# Altium PCB dc24.PcbDoc
Units mm, origin at the board's own origin, x right, y up, seen from the top; angles counter-clockwise.
Board outline 49.25 x 49.25 mm, 2 copper layers (Top Layer, Bottom Layer); 82 components, 56 nets, 250 pads, 180 vias.
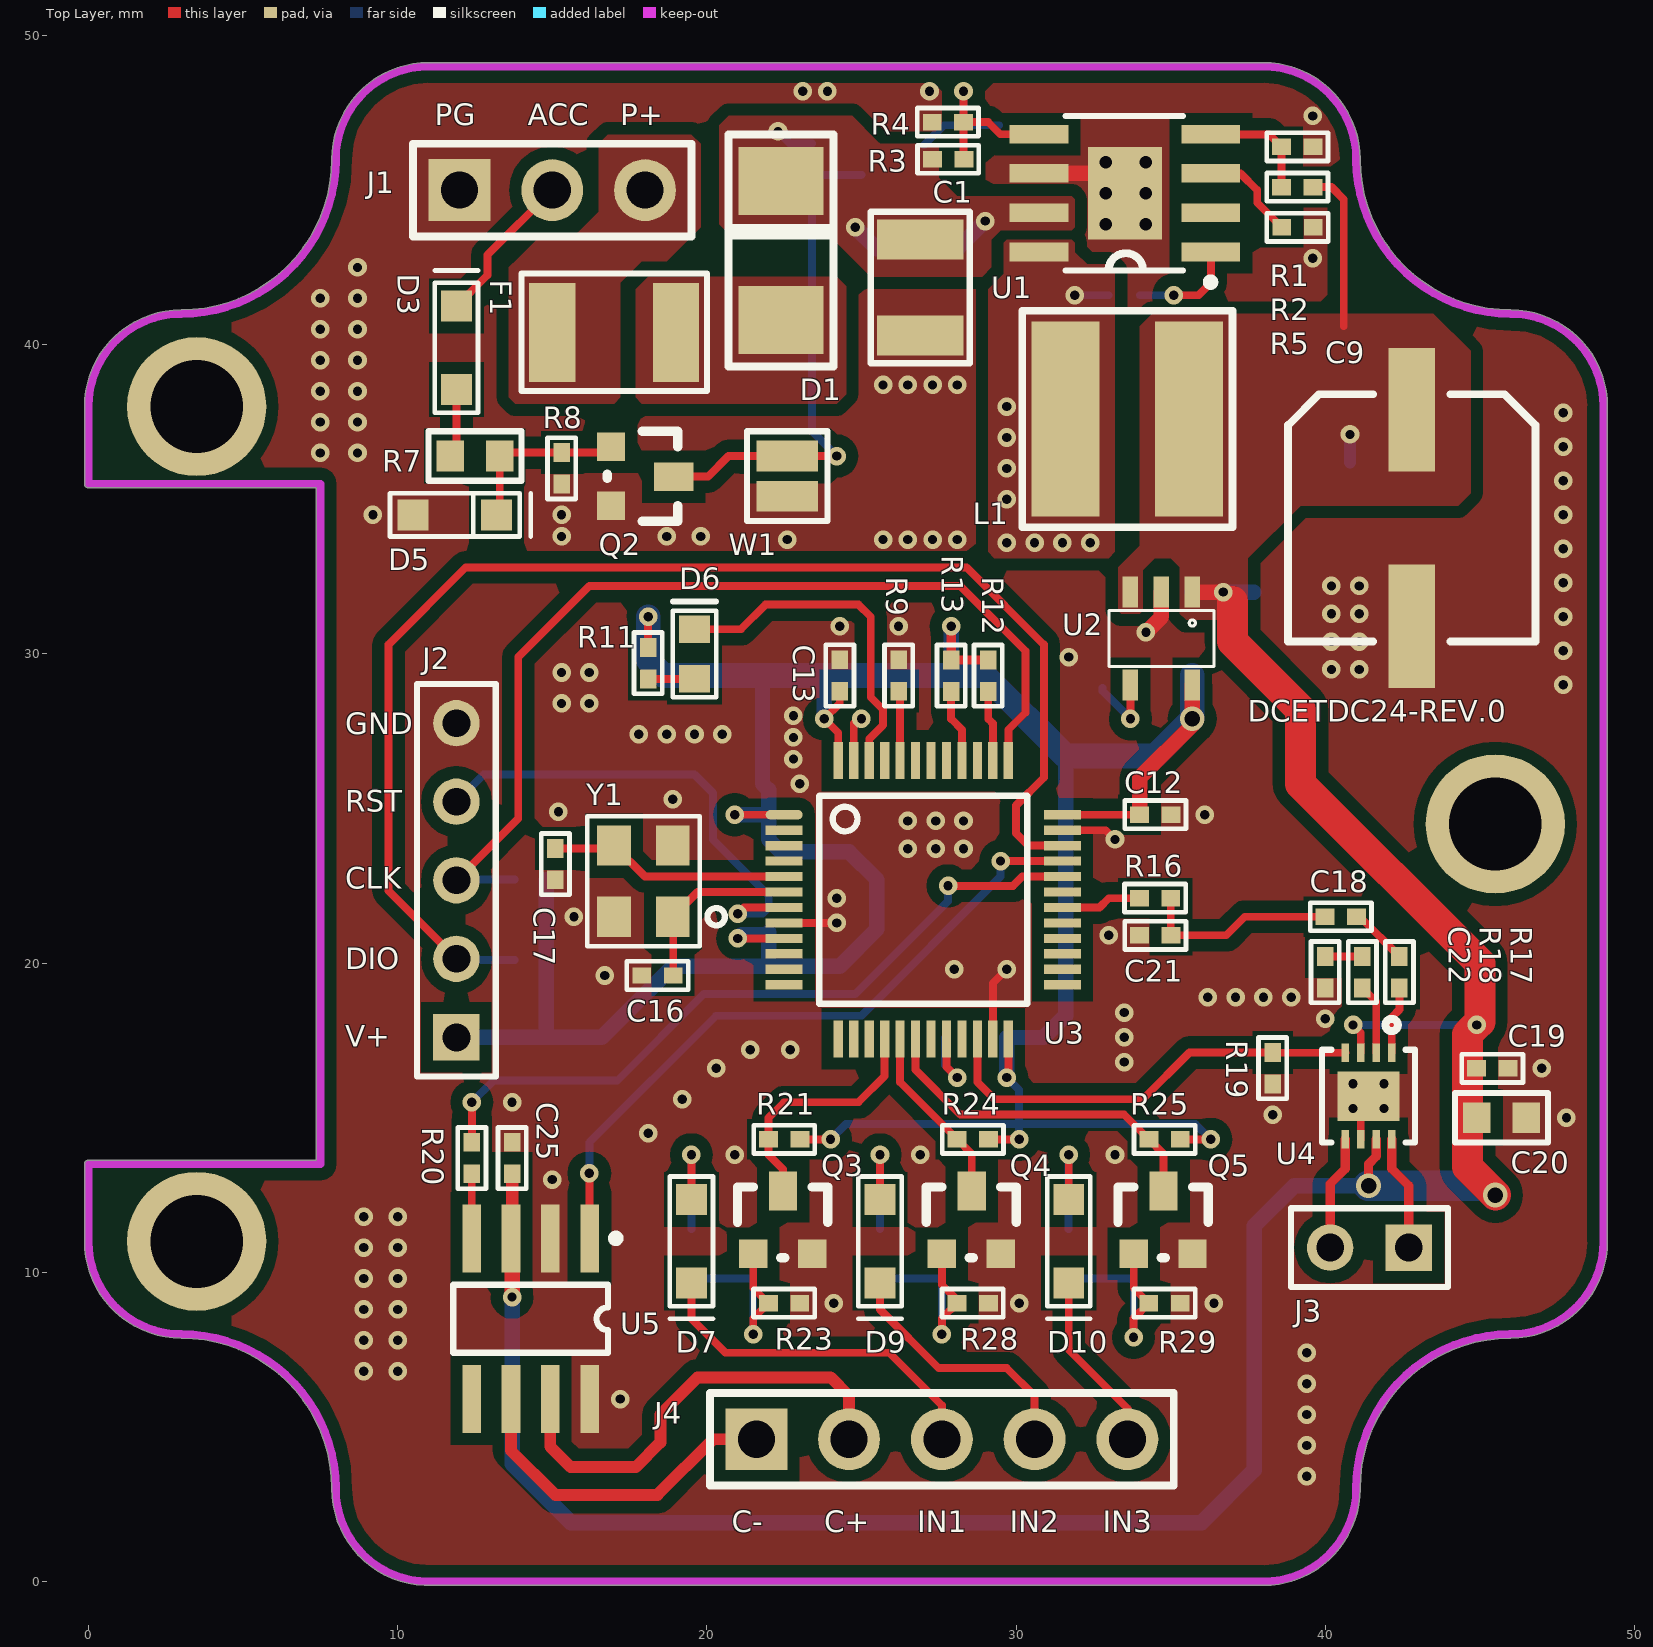
[diagram p0: Top Layer view]
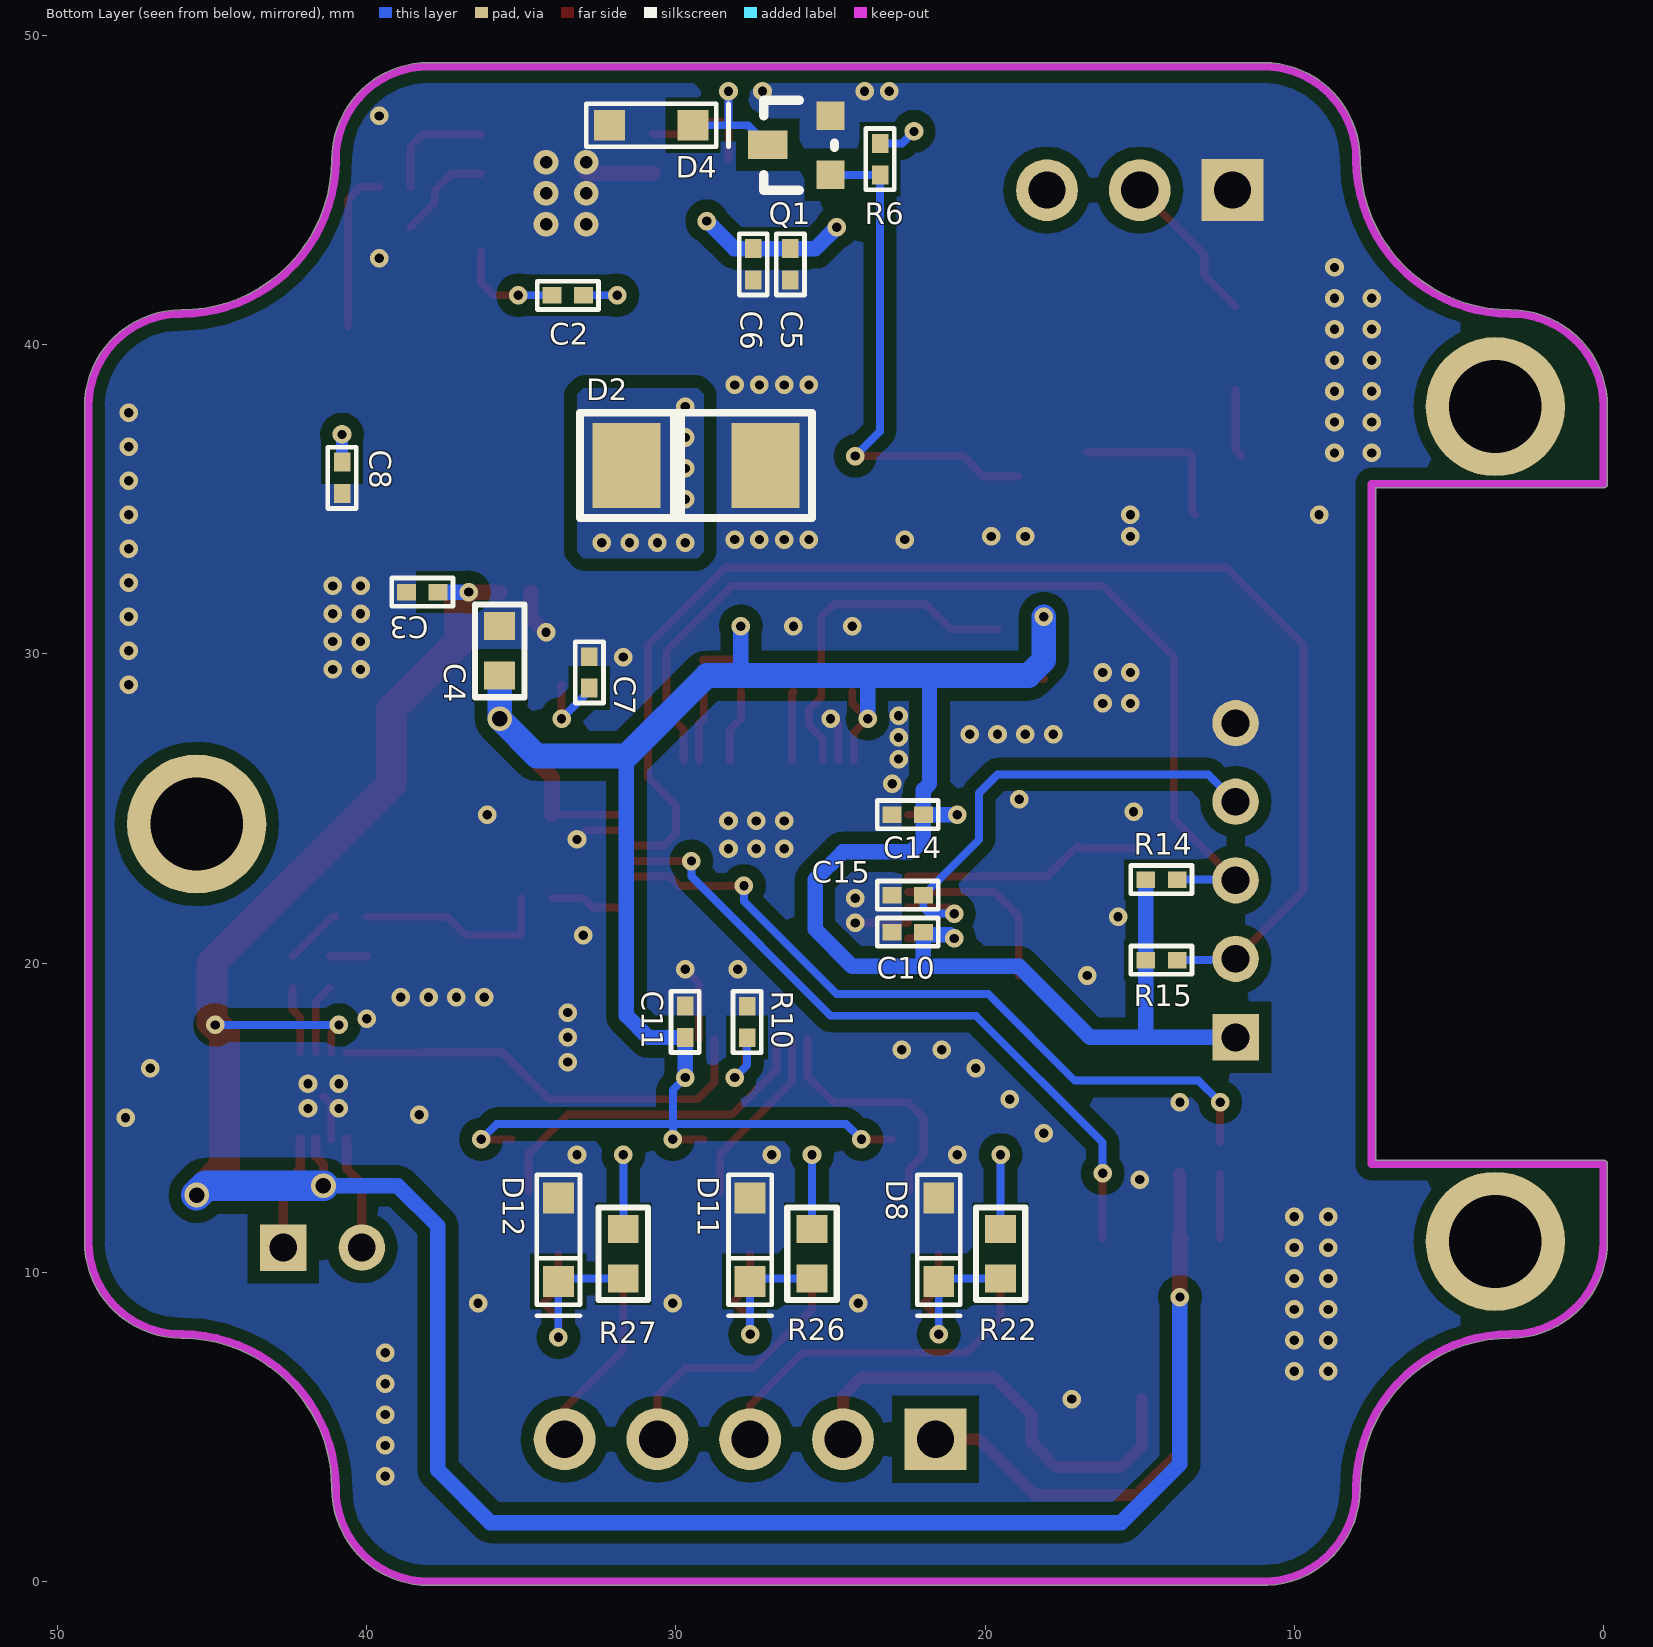
[diagram p1: Bottom Layer view, seen from below]

## Layer stack, top to bottom
Top Solder: solder mask 0.0102, Solder Resist, Dk 3.5
Top Layer: signal copper 0.0356
Dielectric 1: dielectric 0.32, FR-4, Dk 4.8
Bottom Layer: signal copper 0.0356
Bottom Solder: solder mask 0.0102, Solder Resist, Dk 3.5

## Board outline
3,7.873 cw(c3,11) -0.127,11 -0.127,13.5 cw(c0,13.5) 0,13.627 7.373,13.627 7.373,35.373 0,35.373 cw(c0,35.5) -0.127,35.5 -0.127,38 cw(c3,38) 3,41.127 ccw(c3,46) 7.873,45.979 cw(c8,45.978) 7.873,45.989 cw(c8,46) 7.873,46 cw(c11,46) 11,49.127 38,49.127 cw(c38,46) 41.127,46 cw(c41,46) 41.127,45.989 cw(c41,45.978) 41.127,45.979 ccw(c46,46) 46,41.127 cw(c46,38) 49.127,38 49.127,11 cw(c46,11) 46,7.873 cw(c46,8) 45.989,7.873 cw(c45.978,8) 45.979,7.873 ccw(c46,3) 41.127,3 cw(c38,3) 38,-0.127 10.9,-0.127 cw(c10.9,0) 10.875,-0.125 cw(c11,3) 7.873,3 cw(c8,3) 7.873,3.011 cw(c8,3.022) 7.873,3.021 ccw(c3,3)

## Design rules (kind name [scope] priority, off if disabled: settings)
Clearance Clearance_1 [InPolygon AND InNet('GND')] p1: gap=0.4
Clearance [All] p2: gap=0.127
ComponentClearance [All] p1: gap=0 collisioncheckmode=3 verticalgap=0 showdistances=FALSE
DiffPairsRouting [All] p1: maxlimit=0.254 minlimit=0.254 mostfreqgap=0.254 toplayer_minwidth=0.381 toplayer_maxwidth=0.381 toplayer_prefwidth=0.381 bottomlayer_minwidth=0.381 bottomlayer_maxwidth=0.381 bottomlayer_prefwidth=0.381 maxuncoupledlength=12.7
PolygonConnect [All] p1: connectstyle=Direct reliefconductorwidth=0.254 reliefentries=4 polygonreliefangle="90 Angle" airgapwidth=0.254
RoutingVias [All] p1: holewidth=0.3 width=0.6 viastyle="Through Hole" minholewidth=0.3 minwidth=0.6 maxholewidth=0.4 maxwidth=0.8
SolderMaskExpansion [All] p1: expansion=0.102
Width [All] p1: maxlimit=4 minlimit=0.254 preferedwidth=0.254 minimp=50.000000 maximp=50.000000 favimp=50.000000
28 further rules are at their usual default settings.

## Classes and differential pairs
component class 4-IO: C25 D7 D8 D9 D10 D11 D12 J4 Q3 Q4 Q5 R20 R21 R22 R23 R24 R25 R26 R27 R28 R29 U5
component class 3-AUDIO-AMP: C18 C19 C20 C21 C22 J3 R16 R17 R18 R19 U4
component class 2-MCU: C10 C11 C12 C13 C14 C15 C16 C17 D6 J2 R9 R10 R11 R12 R13 R14 R15 U3 Y1
component class 1-POWER: C1 C2 C3 C4 C5 C6 C7 C8 C9 D1 D2 D3 D4 D5 F1 J1 L1 Q1 Q2 R1 R2 R3 R4 R5 R6 R7 R8 U1 U2 W1
differential pair CAN: +CAN_P -CAN_N

## Components (designator, comment, footprint, x,y, rotation, side; value= is the part's Value field where it differs from the comment)
C1 "10uF/50V" 1210 26.9,43.4 r270 top
C2 "0.01uF/50V" 0402 33.5,41.6 r180 bottom
C3 "0.1uF/50V" 0402 38.2,32 r0 bottom
C4 "10uF/6.3V" 0603 35.7,30.1 r180 bottom
C5 "1000pF/50V" 0402 26.3,42.6 r90 bottom
C6 "0.1uF/50V" 0402 27.5,42.6 r90 bottom
C7 "0.01uF/50V" 0402 32.8,29.4 r90 bottom
C8 "0.1uF/50V" 0402 40.8,35.7 r270 bottom
C9 "220uF/16V" DL-8*10.5 42.8,34.4 r0 top
C10 "0.1uF/50V" 0402 22.5,21 r0 bottom
C11 "0.1uF/50V" 0402 29.7,18.1 r90 bottom
C12 "0.1uF/50V" 0402 34.5,24.8 r0 top
C13 "0.1uF/50V" 0402 24.3,29.3 r90 top
C14 "0.1uF/50V" 0402 22.5,24.8 r0 bottom
C15 "0.1uF" 0402 22.5,22.2 r0 bottom
C16 "20pF/50V" 0402 18.4,19.6 r0 top
C17 "20pF/50V" 0402 15.1,23.2 r90 top
C18 "0.1uF/50V" 0402 40.5,21.5 r0 top
C19 "0.1uF/50V" 0402 45.4,16.6 r0 top
C20 "10uF/6.3V" 0603 45.7,15 r270 top
C21 "0.1uF/50V" 0402 34.5,20.9 r0 top
C22 "0.1uF/50V" 0402 40,19.705 r90 top
C25 "0.1uF/50V" 0402 13.7,13.7 r270 top
D1 "MBRS260T3G" SMB 22.4,40.8 r90 top
D2 "MBRS260T3G" SMB 27.1,36.1 r0 bottom
D3 "MM3Z6V2ST1G" SOD323F 11.9,39.9 r270 top
D4 "MM3Z5V1ST1G" SOD323F 30.8,47.1 r0 bottom
D5 "1N5819HW" 1N5819 13.2,34.5 r180 top
D6 "LED GREEN" LED0603 19.6,29.2 r180 top
D7 "MM3Z6V2ST1G" SOD323F 19.5,11 r90 top
D8 "1N5819HW" 1N5819 21.5,9.7 r90 bottom
D9 "MM3Z6V2ST1G" SOD323F 25.6,11 r90 top
D10 "MM3Z6V2ST1G" SOD323F 31.705,11 r90 top
D11 "1N5819HW" 1N5819 27.6,9.7 r90 bottom
D12 "1N5819HW" 1N5819 33.805,9.7 r90 bottom
F1 "1.1A/33V" 1812 19,40.4 r180 top
J1 "POWER" HEAD-3P 12,45 r0 top
J2 "SWD" HDR1X5 11.9,17.6 r90 top
J3 "SPEAKER" HDR1X2 42.7,10.8 r180 top
J4 "I/O" HEAD-5P 21.6,4.6 r0 top
L1 "8.2uH/1.6A" IND-SMD-5.8*5.8 33.6,37.6 r90 top
Q1 "S9014" NPN 25,45.5 r90 bottom
Q2 "S9014" NPN 16.9,36.7 r270 top
Q3 "S9014" NPN 21.5,10.6 r0 top
Q4 "S9014" NPN 27.6,10.6 r0 top
Q5 "S9014" NPN 33.805,10.6 r0 top
R1 "1.1K/1%" 0402 39.1,46.4 r180 top
R2 "3.16K/1%" 0402 39.1,45.1 r180 top
R3 "80.2K/1%" 0402 27.8,46 r0 top
R4 "20K/1%" 0402 27.8,47.2 r180 top
R5 "DNP" 0402 39.1,43.8 r0 top
R6 "47K" 0402 23.4,46 r90 bottom
R7 "15K" 0603 12.5,36.4 r270 top
R8 "47K" 0402 15.3,36 r90 top
R9 "0" 0402 26.2,29.3 r90 top
R10 "0" 0402 27.7,18.1 r270 bottom
R11 "330" 0402 18.1,29.7 r90 top
R12 "10K" 0402 29.1,29.3 r270 top
R13 "10K" 0402 27.9,29.3 r270 top
R14 "10K" 0402 14.3,22.7 r180 bottom
R15 "10K" 0402 14.3,20.1 r180 bottom
R16 "2K" 0402 34.5,22.1 r180 top
R17 "30K" 0402 42.4,19.705 r90 top
R18 "30K" 0402 41.2,19.705 r90 top
R19 "10K" 0402 38.3,16.6 r90 top
R20 "1K" 0402 12.4,13.7 r270 top
R21 "47K" 0402 22.5,14.3 r0 top
R22 "15K" 0603 19.5,10.6 r0 bottom
R23 "47K" 0402 22.5,9 r180 top
R24 "47K" 0402 28.6,14.3 r0 top
R25 "47K" 0402 34.8,14.3 r0 top
R26 "15K" 0603 25.6,10.6 r0 bottom
R27 "15K" 0603 31.705,10.6 r0 bottom
R28 "47K" 0402 28.6,9 r180 top
R29 "47K" 0402 34.805,9 r180 top
U1 "LM22676MR-ADJ" PSO8 36.3,43 r90 top
U2 "SPX3819M5-3.3" SOT23-5 35.7,32 r180 top
U3 "STM32F103CBT6" LQFP48 22.5,24.8 r0 top
U4 "LM4673SD" WSON8 41.4,15.7 r180 top
U5 "TJA1040T" SO8 14.3,8.5 r180 top
W1 "Jumper" SHORTCUT 22.6,35.1 r90 top
Y1 "8MHz" XTAL4_SX_3225 18.9,21.5 r90 top

## Footprints (in the part's own frame and the unit in brackets; to place one, negate y for a bottom-side part, rotate by r counter-clockwise, add the part's x,y. Pads: shape width x height; smd on the part's side, far side on the other; paste and mask are expansions set on the pad)
1N5819 [mm]
  rect 1x1 smd: 1(2.7,0) 2(0,0)
  silkscreen extent -1.1,-0.7 3.45,0.7
0402 [mil] "Chip Capacitor, Body 1.0x0.5mm, IPC High Density"
  rect 24x21 smd: 1(20.13,0) 2(-19.87,0)
  silkscreen extent -39,-18 39,18
0603 [mm]
  rect 1x0.9 smd: 1(0,0.8) 2(0,-0.8)
  silkscreen extent -0.8,-1.5 0.8,1.5
1210 [mm]
  rect 1.3x2.8 smd: 1(0,0) 2(3.1,0)
  silkscreen extent -0.9,-1.6 4,1.6
1812 [mm]
  rect 1.5x3.2 smd: 1(0,0) 2(4,0)
  silkscreen extent -1,-1.9 5,1.9
DL-8*10.5 [mm]
  rect 1.5x4 smd: 1(0,3.5) 2(0,-3.5)
  silkscreen extent -4,-4 4,4
HDR1X2 [mm] "Connector; Header; 2 Position"
  rect 1.5x1.5 hole 0.9: 1(0,0)
  round 1.5 hole 0.9: 2(2.54,0)
  silkscreen extent -1.27,-1.27 3.81,1.27
HDR1X5 [mm] "Connector; Header; 5 Position"
  rect 1.5x1.5 hole 0.9: 1(0,0)
  round 1.5 hole 0.9: 2(2.54,0) 3(5.08,0) 4(7.62,0) 5(10.16,0)
  silkscreen extent -1.27,-1.27 11.43,1.27
HEAD-3P [mm]
  rect 2x2 hole 1.2: 1(0,0)
  round 2 hole 1.2: 2(3,0) 3(6,0)
  silkscreen extent -1.5,-1.5 7.5,1.5
HEAD-5P [mm]
  rect 2x2 hole 1.2: 1(0,0)
  round 2 hole 1.2: 2(3,0) 3(6,0) 4(9,0) 5(12,0)
  silkscreen extent -1.5,-1.5 13.5,1.5
IND-SMD-5.8*5.8 [mm]
  rect 6.3x2.2 smd: 1(0,2) 2(0,-2)
  silkscreen extent -3.5,-3.4 3.5,3.4
LED0603 [mm]
  rect 1x0.9 smd: 1(0,0) 2(0,-1.6)
  silkscreen extent -0.7,-2.5 0.7,0.6
LQFP48 [mm]
  oval 1.2x0.3 smd: 1(0,0)
  rect 1.2x0.3 smd: 2(0,-0.5) 3(0,-1) 4(0,-1.5) 5(0,-2) 6(0,-2.5) 7(0,-3) 8(0,-3.5) 9(0,-4) 10(0,-4.5) 11(0,-5) 12(0,-5.5) 25(9,-5.5) 26(9,-5) 27(9,-4.5) 28(9,-4) 29(9,-3.5) 30(9,-3) 31(9,-2.5) 32(9,-2) 33(9,-1.5) 34(9,-1) 35(9,-0.5) 36(9,0)
  rect 0.3x1.2 smd: 13(1.75,-7.25) 14(2.25,-7.25) 15(2.75,-7.25) 16(3.25,-7.25) 17(3.75,-7.25) 18(4.25,-7.25) 19(4.75,-7.25) 20(5.25,-7.25) 21(5.75,-7.25) 22(6.25,-7.25) 23(6.75,-7.25) 24(7.25,-7.25) 37(7.25,1.75) 38(6.75,1.75) 39(6.25,1.75) 40(5.75,1.75) 41(5.25,1.75) 42(4.75,1.75) 43(4.25,1.75) 44(3.75,1.75) 45(3.25,1.75) 46(2.75,1.75) 47(2.25,1.75) 48(1.75,1.75)
  silkscreen extent 1.13,-6.11 7.86,0.62
NPN [mil]
  rect 36x50 smd: 1(38,80)
  rect 36x36 smd: 2(0,0) 3(75,0)
  silkscreen extent -20,-5 95,85
PSO8 [mm]
  rect 0.6x1.9 smd: 1(0,0) 2(1.27,0) 3(2.54,0) 4(3.81,0) 5(3.81,5.56) 6(2.54,5.56) 7(1.27,5.56) 8(0,5.56)
  rect 3x2.4 smd: 9(1.9,2.78)
  silkscreen extent -1.1,-0.12 4.4,4.7
SHORTCUT [mm]
  rect 1x2 smd paste-0.5: 1(0,0) 2(1.3,0)
  silkscreen extent -0.8,-1.3 2.1,1.3
SMB [mm]
  rect 2.2x2.75 smd: 1(0,0) 2(4.5,0)
  silkscreen extent -1.5,-1.7 6,1.7
SO8 [mm] "Small Outline; 8 Leads; Body Width 3.9 mm; Pitch 1.27 mm"
  rect 0.6x2.2 smd: 1(-1.905,-2.6) 2(-0.635,-2.6) 3(0.635,-2.6) 4(1.905,-2.6) 5(1.905,2.6) 6(0.635,2.6) 7(-0.635,2.6) 8(-1.905,2.6)
  silkscreen extent -2.88,-2.72 2.5,1.1
SOD323F [mm]
  rect 1x1 smd: 1(-1.35,0) 2(1.35,0)
  silkscreen extent -2.5,-0.7 2.1,0.7
SOT23-5 [mm]
  rect 0.5x1 smd: 1(0,0) 2(1,0) 3(2,0) 4(2,3) 5(0,3)
  silkscreen extent -0.7,0.6 2.7,2.4
WSON8 [mm]
  rect 0.25x0.6 smd: 1(-0.75,-1.4) 2(-0.25,-1.4) 3(0.25,-1.4) 4(0.75,-1.4) 5(0.75,1.4) 6(0.25,1.4) 7(-0.25,1.4) 8(-0.75,1.4)
  rect 2x1.6 smd: ""(0,0)
  silkscreen extent -1.5,-2.5 1.5,1.5
XTAL4_SX_3225 [mil]
  rect 51x43 smd: 1(0,0) 2(90.56,0) 3(90.56,74.8) 4(0,74.8)
  silkscreen extent -37,-66 128,109

## Part data
C1 C2 C3 C4 C5 C6 C7 C8 C10 C11 C12 C13 C14 C15 C16 C17 C18 C19 C20 C21 C22: library part Cap, "Capacitor"
C9: library part "CAP WP"
C25: library part "P_CAP NP"
D1 D2 D5 D8 D11 D12: library part "Diode 11DQ03", "Schottky Rectifier"
D3 D4 D7 D9 D10: library part MMGZ5231BPTLL34
D6: library part LN01401_1
F1: library part 2A_32VDC_0467-002
J1: library part "Header 3", "Header, 3-Pin"
J2 J4: library part "Header 5", "Header, 5-Pin"
J3: library part "Header 2", "Header, 2-Pin"
L1: library part 4.7UH_CDH2D09BNP-4R7MC_0.7A_20%
Q1 Q2 Q3 Q4 Q5: library part MMBT3904_NL_SOT23-3
R1 R2 R3 R4 R5 R6 R9 R10 R12 R13 R14 R15 R16 R17 R18 R19 R21 R24 R25: library part Res3, "Resistor"
R7 R8 R22 R23 R26 R27 R28 R29: library part R
R11: library part CR16-1003FM
R20: library part P_R
U1: library part LM22670_0
U2: library part TPS73633DBVT
U3: library part STM32F103CX-LQFP48
U5: library part TJA1040T_SO_8P, "IC XCVR CAN HS 5V SO8"
W1: "Jumper Wire"
Y1: library part XTAL_13Y_A, "XTAL 24MHZ -- 3.2X2.5MM SMT"

## Free pads (board coordinates)
  round 4.5 hole 3: ""(3.5,11) ""(3.5,38) ""(45.5,24.5)

## Via types
v1: diameter 0.6, hole 0.3, Top Layer to Bottom Layer, tented both sides, 171 vias
v2: diameter 0.8, hole 0.4, Top Layer to Bottom Layer, tented both sides, 6 vias
v3: diameter 0.8, hole 0.5, Top Layer to Bottom Layer, tented both sides, 3 vias

## Nets (pads, with @x,y where several pads share a name; then routed paths per layer and width w, separated by ;. In a path a pad name is that pad's centre, name@x,y a point inside that pad or via, vN(x,y) a via of type N, cw(c..) or ccw(c..) an arc to the next point about the centre after c; other vN are vias at no path point)
ACC: D3.1 J1.2 | length 5
  Top Layer w0.254: D3.1 12.9,42.25 12.9,42.9 J1.2
AMP-SHDN: R19.1 U3.22 U4.4 | length 14.1
  Top Layer w0.254: U3.22 28.75,16.15 29.3,15.6 34.1,15.6 35.611,17.111 R19.1 ; R19.1@38.389,17.1 U4.4
CAN_N: J4.1 U5.6 | length 10.9
  Top Layer w0.381: U5.6 13.665,4.235 15.1,2.8 18.4,2.8 20.2,4.6 J4.1
CAN_P: J4.2 U5.7 | length 14.9
  Top Layer w0.381: U5.7 14.935,4.365 15.6,3.7 17.7,3.7 18.5,4.5 18.5,5.4 19.7,6.6 24,6.6 24.6,6 J4.2
CANRX: R20.2 U3.32 | length 23.7
  Top Layer w0.254: R20.2 v1(12.4,15.5) ; v1(27.8,22.5) 29.9,22.5 30.2,22.8 U3.32
  Bottom Layer w0.254: v1(12.4,15.5) 13.1,16.2 17.1,16.2 19.9,19 24.8,19 27.8,22 v1(27.8,22.5)
CANTX: U3.33 U5.1 | length 22.5
  Top Layer w0.254: v1(16.2,13.2) 16.2,11.105 U5.1 ; v1(29.5,23.3) U3.33
  Bottom Layer w0.254: v1(16.2,13.2) 16.2,14.2 20.3,18.3 25,18.3 29.5,22.8 v1(29.5,23.3)
GND: C1.2 C3.1 C4.1 C5.2 C6.2 C7.1 C8.1 C9.2 C10.1 C11.1 C12.1 C13.1 C14.1 C15.1 C16.2 C17.2 C19.1 C20.1 C21.2 C22.2 C25.2 D2.1 D4.2 D5.1 D8.1 D11.1 D12.1 J1.1 J2.5 Q1.3 Q2.3 Q3.3 Q4.3 Q5.3 R1.2 R4.1 R5.1 R8.2 R9.1 R10.2 R19.2 R23.2 R28.2 R29.2 U1.6 U1.9 U2.2 U3.8 U3.23 U3.35 U3.47 U4. U4.6 U5.2 U5.8 W1.1 Y1.2 Y1.4 | length 12.6
  Top Layer w0.254: U3.8 v1(24.2,21.3) ; U3.47 24.75,27.75 24.9,27.9 v1(25,27.9) ; U3.23 29.25,19.35 v1(29.7,19.8) ; U3.35 32.9,24.3 v1(33.2,24) ; U4.6 41.15,15.45 U4.
  Top Layer w0.5: U1.6 U1.9@32.88,45.54 ; v1(34.2,30.7) 34.7,31.2 U2.2
  other v1: 39.4,3.4 39.4,4.4 39.4,5.4 17.2,5.9 39.4,6.4 8.9,6.8 10,6.8 39.4,7.4 8.9,7.8 10,7.8 8.9,8.8 10,8.8 24.1,9 30.1,9 36.4,9 8.9,9.8 10,9.8 8.9,10.8 10,10.8 8.9,11.8 10,11.8 15,13 20.9,13.8 26.9,13.8 33.2,13.8 18.1,14.5 47.8,15 38.3,15.1 40.9,15.3 41.9,15.3 13.7,15.5 19.2,15.6 40.9,16.1 41.9,16.1 20.3,16.6 47,16.6 33.5,16.8 21.4,17.2 22.7,17.2 33.5,17.6 40,18.2 33.5,18.4 36.2,18.9 37.1,18.9 38,18.9 38.9,18.9 16.7,19.6 28,19.8 33,20.9 15.7,21.5 24.2,22.1 26.5,23.7 27.4,23.7 28.3,23.7 26.5,24.6 27.4,24.6 28.3,24.6 36.1,24.8 15.2,24.9 18.9,25.3 23,25.8 22.8,26.6 22.8,27.3 17.8,27.4 18.7,27.4 19.6,27.4 20.5,27.4 22.8,28 15.3,28.4 16.2,28.4 47.7,29 15.3,29.4 16.2,29.4 40.2,29.5 41.1,29.5 31.7,29.9 47.7,30.1 40.2,30.4 41.1,30.4 24.3,30.9 26.2,30.9 47.7,31.2 40.2,31.3 41.1,31.3 40.2,32.2 41.1,32.2 47.7,32.3 47.7,33.4 22.6,33.7 25.7,33.7 26.5,33.7 27.3,33.7 28.1,33.7 15.3,33.8 18.7,33.8 19.8,33.8 9.2,34.5 15.3,34.5 47.7,34.5 47.7,35.6 7.5,36.5 8.7,36.5 47.7,36.7 7.5,37.5 8.7,37.5 47.7,37.8 7.5,38.5 8.7,38.5 25.7,38.7 26.5,38.7 27.3,38.7 28.1,38.7 7.5,39.5 8.7,39.5 7.5,40.5 8.7,40.5 7.5,41.5 8.7,41.5 8.7,42.5 39.6,42.8 39.6,47.4 23.1,48.2 23.9,48.2 27.2,48.2
  other v2: 32.9,43.9 34.2,43.9 32.9,44.9 34.2,44.9 32.9,45.9 34.2,45.9
IN1: Q3.1 R21.2 U3.16 | length 8.1
  Top Layer w0.254: Q3.1 22.465,13.335 21.995,13.805 R21.2 21.995,14.995 22.5,15.5 24.9,15.5 25.75,16.35 U3.16
IN2: Q4.1 R24.2 U3.17 | length 5.9
  Top Layer w0.254: U3.17 26.25,16.145 R24.2 28.565,13.83 Q4.1
IN3: Q5.1 R25.2 U3.18 | length 11.3
  Top Layer w0.254: U3.18 26.75,16.55 28.2,15.1 33.495,15.1 R25.2 34.77,13.825 Q5.1
IN4: U3.19
INPUT1: D7.1 J4.3 | length 11.5
  Top Layer w0.254: D7.1 19.5,8.5 20.6,7.4 25.9,7.4 27.6,5.7 J4.3
INPUT2: D9.1 J4.4 | length 8.4
  Top Layer w0.254: D9.1 25.6,8.8 27.5,6.9 29.7,6.9 30.6,6 J4.4
INPUT3: D10.1 J4.5 | length 5.8
  Top Layer w0.254: D10.1 31.705,7.495 33.6,5.6 J4.5
LED: D6.2 U3.46 | length 11.2
  Top Layer w0.254: D6.2 21.1,30.8 21.9,31.6 24.9,31.6 25.3,31.2 25.3,28.6 25.7,28.2 25.7,27.7 25.25,27.25 U3.46
NetC2_1: C2.1 D2.2 L1.1 U1.8 | length 1.1
  Bottom Layer w0.254: v1(31.9,41.6) C2.1
  other v1: 29.7,33.6 30.6,33.6 31.5,33.6 32.4,33.6 29.7,35 29.7,36 29.7,37 29.7,38
NetC2_2: C2.2 U1.1 | length 3.5
  Top Layer w0.254: v1(35.1,41.6) 35.9,41.6 36.3,42 U1.1
  Bottom Layer w0.254: C2.2 v1(35.1,41.6)
NetC7_2: C7.2 U2.4 | length 2.5
  Top Layer w0.254: v1(33.7,27.9) U2.4
  Bottom Layer w0.254: C7.2 32.8,28.8 v1(33.7,27.9)
NetC18_1: C18.1 R17.1 | length 1.9
  Top Layer w0.254: C18.1 41.116,21.5 R17.1
NetC18_2: C18.2 C21.1 R16.2 | length 6.4
  Top Layer w0.254: C21.1@35.005,20.906 R16.2 ; C21.1 36.8,20.9 37.4,21.5 C18.2
NetC22_1: C22.1 R18.1 | length 1.2
  Top Layer w0.254: C22.1 R18.1
NetD1_1: D1.1 F1.1
NetD3_2: D3.2 R7.2 | length 2.2
  Top Layer w0.254: R7.2 11.9,36.6 D3.2
NetD4_1: D4.1 Q1.1 R3.1 R4.2 U1.5 | length 8.6
  Top Layer w0.254: v1(28.3,48.2) 28.305,48.195 R4.2 ; R3.1 28.305,46.006 R4.2 ; U1.5 29.49,46.81 29.1,47.2 R4.2
  Bottom Layer w0.254: Q1.1 27.667,47.1 28.3,47.1 ; v1(28.3,48.2) 28.3,47.1 ; D4.1 28.3,47.1
NetD5_2: D5.2 Q2.2 R7.1 R8.1 | length 5.4
  Top Layer w0.254: D5.2 13.3,34.6 R7.1 13.411,36.511 R8.1 Q2.2@16.711,36.511
NetD6_1: D6.1 R11.2 | length 1.5
  Top Layer w0.254: R11.2 19.595,29.195 D6.1
NetD7_2: D7.2 R22.2 | length 3.8
  Top Layer w0.254: D7.2 v1(19.5,13.8)
  Bottom Layer w0.254: R22.2 v1(19.5,13.8)
NetD8_2: D8.2 Q3.2 R22.1 R23.1 | length 6.7
  Top Layer w0.254: v1(21.5,8) 21.5,8.511 R23.1 21.5,9.489 Q3.2
  Bottom Layer w0.254: R22.1 21.4,9.8 D8.2 v1(21.5,8)
NetD9_2: D9.2 R26.2 | length 3.9
  Top Layer w0.254: D9.2 v1(25.6,13.8)
  Bottom Layer w0.254: R26.2 v1(25.6,13.8)
NetD10_2: D10.2 R27.2 | length 3.9
  Top Layer w0.254: v1(31.7,13.8) 31.705,13.795 D10.2
  Bottom Layer w0.254: v1(31.7,13.8) 31.7,11.405 R27.2
NetD11_2: D11.2 Q4.2 R26.1 R28.1 | length 6.7
  Top Layer w0.254: v1(27.6,8) 27.6,8.511 R28.1 28.089,9.111 27.6,9.6 Q4.2
  Bottom Layer w0.254: R26.1 27.5,9.8 D11.2 v1(27.6,8)
NetD12_2: D12.2 Q5.2 R27.1 R29.1 | length 7.1
  Top Layer w0.254: v1(33.8,7.9) 33.8,8.506 R29.1 33.805,9.489 Q5.2
  Bottom Layer w0.254: R27.1 33.705,9.8 D12.2 33.805,8.005 33.8,8 v1(33.8,7.9)
NetF1_2: F1.2 J1.3
NetJ3_1: J3.1 U4.8 | length 3.7
  Top Layer w0.3: U4.8 42.15,13.35 42.7,12.8 J3.1
NetJ3_2: J3.2 U4.5 | length 3.7
  Top Layer w0.3: J3.2 40.16,12.86 40.65,13.35 U4.5
NetQ1_2: Q1.2 Q2.1 R6.2 W1.2 | length 16.6
  Top Layer w0.254: Q2.1 20.035,35.735 20.7,36.4 W1.2 v1(24.2,36.4)
  Bottom Layer w0.254: v1(24.2,36.4) 23.4,37.2 R6.2 24.995,45.495 Q1.2
NetR1_1: R1.1 R2.1 U1.4 | length 3.8
  Top Layer w0.254: U1.4 36.31,46.8 38.189,46.8 R1.1 R2.1
NetR5_2: R5.2 U1.3 | length 3.3
  Top Layer w0.254: U1.3 37.26,45.54 37.8,45 37.8,44.595 R5.2
NetR9_2: R9.2 U3.44 | length 2.3
  Top Layer w0.254: R9.2 26.25,28.745 U3.44
NetR10_1: R10.1 U3.20 | length 2.8
  Top Layer w0.254: U3.20 27.75,16.65 v1(28.1,16.3)
  Bottom Layer w0.254: R10.1 27.7,16.7 v1(28.1,16.3)
NetR12_1: R12.1 U3.38 | length 2.3
  Top Layer w0.254: R12.1 29.1,27.9 29.25,27.75 U3.38
NetR13_1: R13.1 U3.40 | length 2.4
  Top Layer w0.254: R13.1 27.9,27.9 28.25,27.55 U3.40
NetR17_2: R17.2 U4.1 | length 2.2
  Top Layer w0.254: U4.1 42.15,18.25 42.4,18.5 R17.2
NetR18_2: R18.2 U4.2 | length 2.3
  Top Layer w0.254: R18.2 41.65,18.75 U4.2
NetR20_1: R20.1 U5.4 | length 2.1
  Top Layer w0.254: U5.4 12.395,13.184 R20.1
NRST: C15.2 J2.4 U3.7 | length 16
  Top Layer w0.254: v1(21,21.6) 21.2,21.8 U3.7
  Bottom Layer w0.254: J2.4 12.78,26.1 19.6,26.1 20.2,25.5 20.2,23.995 C15.2 22,22.195 22,21.8 21.8,21.6 v1(21,21.6)
OUT: U3.21
P3V3: C4.2 C10.2 C11.2 C12.2 C13.2 C14.2 J2.1 R11.1 R12.2 R13.2 R14.2 R15.2 R21.1 R24.1 R25.1 U2.5 U3.1 U3.9 U3.24 U3.36 U3.48 | length 107.2
  Top Layer w0.254: R11.1 v1(18.1,31.2) ; v1(20.9,24.8) U3.1 ; v1(21,20.8) U3.9 ; R21.1 v1(24,14.3) ; U3.48 24.25,27.45 v1(23.8,27.9) 24.3,28.4 C13.2 ; R24.1 v1(30.1,14.3) ; v1(29.7,16.3) 29.7,16.2 29.75,16.15 U3.24 ; U3.36 C12.2 ; R25.1 v1(36.3,14.3)
  Top Layer w0.3: v1(27.9,30.9) R13.2 R12.2
  Top Layer w0.5: C12.2 33.995,25.995 v3@35.7,27.7 ; v3(35.7,27.9) U2.5
  Bottom Layer w0.254: v1(24,14.3) 24.5,14.8 30.1,14.8 ; v1(29.7,16.3) 30.1,15.9 30.1,14.8 ; v1(30.1,14.3) 30.1,14.8 ; v1(36.3,14.3) 35.8,14.8 30.1,14.8
  Bottom Layer w0.3: 27.8,29.3 27.9,29.4
  Bottom Layer w0.5: J2.1 14.8,17.6 ; R14.2 R15.2 14.805,17.605 14.8,17.6 ; v1(20.9,24.8) C14.2 ; v1(21,20.8) 21.123,20.923 C10.2@21.995,20.923 ; 21.8,29.3 21.8,25.8 21.995,25.605 C14.2 ; C10.2 C10.2@21.995,20.923 ; v1(23.8,27.9) 23.8,29.3 ; 27.9,29.4 v1(27.9,30.9) ; v1(29.7,16.3) C11.2 30.895,17.595 31.6,18.3 31.6,26.7 ; 14.8,17.6 16.6,17.6 18.9,19.9 22,19.9 ; C10.2@21.995,20.923 21.995,19.905 22,19.9 ; C14.2 21.995,24.005 22.4,23.6 24.6,23.6 25.5,22.7 25.5,21.1 24.3,19.9 22,19.9
  Bottom Layer w0.8: v1(18.1,31.2) 18.1,29.8 18.6,29.3 21.8,29.3 22.8,29.3 27.8,29.3 29,29.3 31.6,26.7 34.5,26.7 v3(35.7,27.9) C4.2
P5V0: C3.2 C8.2 C9.1 C19.2 C20.2 C25.1 L1.2 R2.2 U2.1 U2.3 U4.3 U4.7 U5.3 | length 89.1
  Top Layer w0.254: R2.2 40.2,45.1 40.6,44.7 40.6,40.6 ; v1(40.9,18) 41.15,17.75 U4.3
  Top Layer w0.3: v3(41.4,12.8) 41.4,13.5 41.65,13.75 U4.7
  Top Layer w0.4: U5.3@13.7,11.135 C25.1
  Top Layer w0.5: U5.3 13.7,11.135 v1(13.7,9.2) ; U2.1 v1(36.7,32)
  Top Layer w1: 37,31.7 37,30.4 39.2,28.2 39.2,25.8 45,20 45,18.1 v1(44.9,18) 44.6,17.7 44.6,13.4 v3(45.5,12.5)
  Bottom Layer w0.254: v1(40.9,18) v1(44.9,18)
  Bottom Layer w0.4: C8.2 v1(40.8,37.1)
  Bottom Layer w0.5: v1(13.7,9.2) 13.7,3.8 15.6,1.9 36,1.9 37.7,3.6 37.7,11.5 39,12.8 v3(41.4,12.8) ; v1(36.7,32) C3.2
  Bottom Layer w1: v3(41.4,12.8) 45.2,12.8 v3(45.5,12.5)
PWM-AUDIO: R16.1 U3.30 | length 2.6
  Top Layer w0.254: U3.30 32.7,21.8 33,22.1 R16.1
SPEED-PULSE: U3.10
SWCLK: J2.3 R14.1 U3.37 | length 31.9
  Top Layer w0.254: J2.3 13.9,24.68 13.9,29.9 16.2,32.2 28.2,32.2 30.3,30.1 30.3,28.1 29.75,27.55 U3.37
  Bottom Layer w0.254: J2.3 11.92,22.7 R14.1
SWDIO: J2.2 R15.1 U3.34 | length 44.4
  Top Layer w0.254: J2.2 9.7,22.34 9.7,30.3 12.2,32.8 28.4,32.8 30.9,30.3 30.9,26 30,25.1 30,24.2 30.4,23.8 U3.34
  Bottom Layer w0.254: J2.2 11.94,20.1 R15.1
VIN: C1.1 C5.1 C6.1 D1.2 R3.2 R6.1 U1.7 | length 6.1
  Bottom Layer w0.254: v1@22.311,46.911 v1(22.3,46.9) 22.689,46.511 R6.1
  Bottom Layer w0.5: v1(24.8,43.8) 25.489,43.111 C5.1 C6.1 28.111,43.111 v1(29,44)
XIN: C17.1 U3.5 Y1.3 | length 7.9
  Top Layer w0.254: C17.1 16.911,23.711 Y1.3 18,22.8 U3.5
XOUT: C16.1 U3.6 Y1.1 | length 5.8
  Top Layer w0.254: C16.1 18.911,21.489 Y1.1 19.7,22.3 U3.6
pads on no net: U1.2 U3.2 U3.3 U3.4 U3.11 U3.12 U3.13 U3.14 U3.15 U3.25 U3.26 U3.27 U3.28 U3.29 U3.31 U3.39 U3.41 U3.42 U3.43 U3.45 U5.5

## Polygon pours and split planes (outlines as drawn)
GND on Top Layer "Top Layer-No Net 1" (solid, remove dead copper, pour order 14): 0,0 1.8,0 49,0 49,49 0,49
P5V0 on Top Layer "Top Layer-No Net 1" (solid, remove dead copper, pour order 16): 34,33.9 34,33.5 33.4,32.9 33.3,32.8 33.3,32 33.3,31.4 33.4,31.3 33.7,31.3 34,31.3 34.1,31.4 34.1,32.7 34.65,33.25
P5V0 on Top Layer "Top Layer-No Net 1" (solid, remove dead copper, pour order 14): 34.7,33.4 35.3,32.8 35.3,32.4 35.3,31.5 35.3,31.3 35.5,31.1 35.6,31.1 37.3,31.1 37.5,31.3 37.5,33.4
P5V0 on Top Layer "Top Layer-No Net 1" (solid, remove dead copper, pour order 12): 35,41 39.1,41 43.5,41 44.7,39.8 44.7,35.2 44.3,34.8 41.9,34.8 39.2,34.8 37.5,33.1 34.5,33.1 34,33.6 34,40.6 34.4,41
NetC2_1 on Top Layer "Top Layer-No Net 1" (solid, remove dead copper, pour order 8): 30.3,43.4 31.8,43.4 31.9,43.3 31.9,43 32.3,42.6 32.5,42.6 33,42.6 33.2,42.4 33.2,33.3 33,33.1 29.3,33.1 29.1,33.3 29.1,41.8 29.6,42.3 29.6,42.7 29.6,43.3 29.7,43.4
VIN on Top Layer "Top Layer-No Net 1" (solid, remove dead copper, pour order 6): 20.7,47.4 24.7,47.4 25.5,46.6 25.6,46.5 26.2,46.5 27.4,46.5 27.5,46.4 27.5,45.4 28.1,44.8 31.8,44.8 31.9,44.7 31.9,43.8 31.8,43.7 29.5,43.7 29.3,43.5 29.2,43.4 29.2,42.8 29.2,42.5 28.9,42.2 25.3,42.2 24.2,43.3 24,43.5 21.8,43.5 20.8,43.5 20.4,43.9 20.4,44 20.4,47.1
NetD1_1 on Top Layer "Top Layer-No Net 1" (solid, remove dead copper, pour order 4): 18.7,42.2 24.2,42.2 24.5,41.9 24.5,38.4 24.2,38.1 17.9,38.1 17.7,38.3 17.7,41.8 18.1,42.2
NetF1_2 on Top Layer "Top Layer-No Net 1" (solid, remove dead copper, pour order 2): 17.7,46.8 19.1,46.8 19.3,46.8 19.5,46.8 19.8,46.5 19.8,46.4 19.8,43.8 18.7,42.7 17.9,42.7 17.2,42 17.2,38.3 17,38.1 13.8,38.1 13.6,38.3 13.6,38.4 13.6,42.5 13.9,42.8 14.5,43.4 14.6,43.5 15.1,43.5 15.7,43.5 16.2,44 16.5,44.3 16.5,44.8 16.5,46.5 16.8,46.8
GND on Bottom Layer "Top Layer-No Net 1" (solid, remove dead copper, pour order 16): 0,0 49,0 49,5.1 49,49 0,49
NetC2_1 on Bottom Layer "Top Layer-No Net 1" (solid, remove dead copper, pour order 10): 29.5,38.6 31.4,38.6 33,38.6 33.2,38.4 33.2,36.2 33.2,33.3 33,33.1 29.3,33.1 29.1,33.3 29.1,38.4 29.3,38.6

## Keep-outs
Keep-Out Layer:
  lines w0.254: 8,3 ccw(c11,3) 11,0 ; 8,3.022 ccw(c3,3) 3,8 cw(c3,11) 0,11 0,13.5 7.5,13.5 7.5,35.5 0,35.5 0,38 cw(c3,38) 3,41 ccw(c3,46) 8,45.978 ; 8,46 cw(c11,46) 11,49 38,49 cw(c38,46) 41,46 ; 10.9,0 38,0 ccw(c38,3) 41,3 cw(c46,3) 45.978,8 ; 41,45.978 ccw(c46,46) 46,41 cw(c46,38) 49,38 49,11 cw(c46,11) 46,8

## Silkscreen, mask and mechanical layers (free items; w line width, h text height)
Top Overlay:
  text "PG" at 11.2,47.1 h0.7
  text "ACC" at 14.2,47.1 h0.7
  text "P+" at 17.2,47.1 h0.7
  text "DCETDC24-REV.0" at 37.5,27.8 h0.7
  text "GND" at 8.3,27.4 h0.7
  text "RST" at 8.3,24.9 h0.7
  text "CLK" at 8.3,22.4 h0.7
  text "DIO" at 8.3,19.8 h0.7
  text "V+" at 8.3,17.3 h0.7
  text "C-" at 20.8,1.6 h0.7
  text "C+" at 23.8,1.6 h0.7
  text "IN1" at 26.8,1.6 h0.7
  text "IN2" at 29.8,1.6 h0.7
  text "IN3" at 32.8,1.6 h0.7